# Altium PCB MB_v1.PcbDoc (part 5 of 10)
Units mm, origin at the board's own origin, x right, y up, seen from the top; angles counter-clockwise.
Board outline 203 x 72 mm, 6 copper layers (Top Layer, Layer 3, Layer 1, Layer 2, Layer 4, Bottom Layer), stack 1.52 mm thick; 655 components, 569 nets, 2943 pads, 1834 vias.
Unrouted connection lines stored in the file: 31.
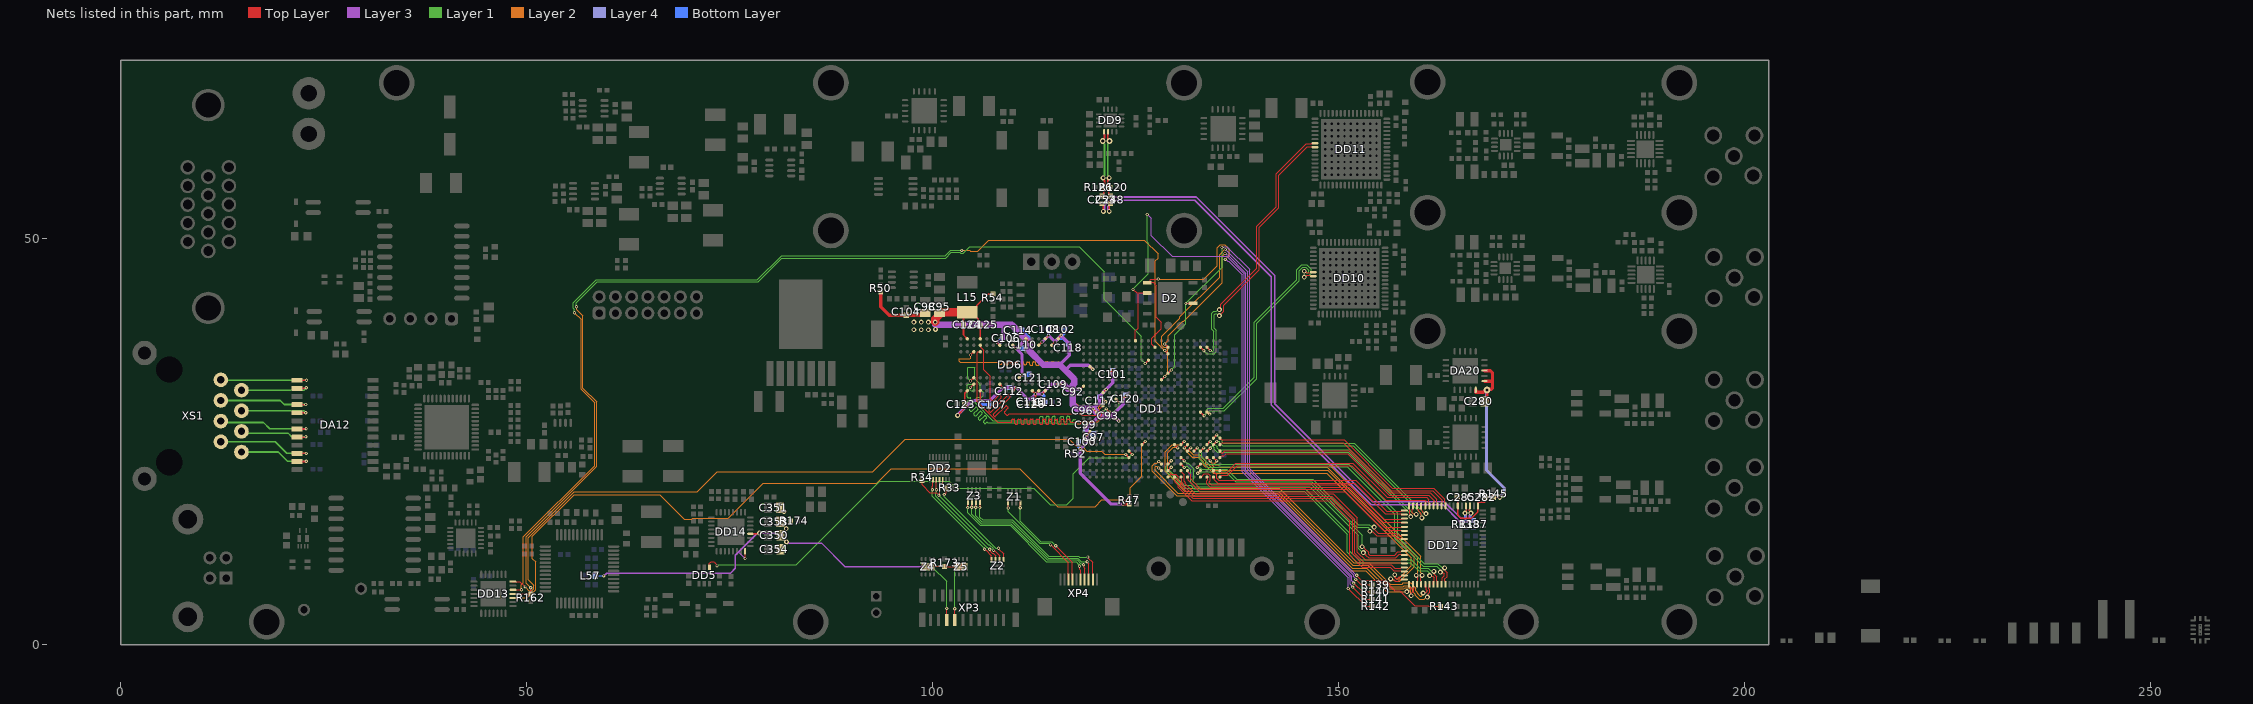
[diagram p8: the nets of this part, all layers, seen from the top]

## Via types
v1: diameter 0.4, hole 0.2, Top Layer to Bottom Layer, tented both sides, 654 vias
v2: diameter 0.8, hole 0.4, Top Layer to Bottom Layer, tented both sides, 489 vias
v3: diameter 0.6, hole 0.3, Top Layer to Bottom Layer, tented both sides, 354 vias
v4: diameter 0.7, hole 0.4, Top Layer to Bottom Layer, tented both sides, 144 vias
v5: diameter 0.8, hole 0.4, Top Layer to Bottom Layer, 87 vias
v6: diameter 0.9, hole 0.5, Top Layer to Bottom Layer, 45 vias
v7: diameter 0.66, hole 0.4, Top Layer to Bottom Layer, 25 vias
v8: diameter 0.7, hole 0.3, Top Layer to Bottom Layer, 13 vias
v9: diameter 0.5, hole 0.2, Top Layer to Bottom Layer, 12 vias
v10: diameter 0.5, hole 0.3, Top Layer to Bottom Layer, 5 vias
v11: diameter 1, hole 0.5, Top Layer to Bottom Layer, 2 vias
v12: diameter 0.4, hole 0.2, Top Layer to Bottom Layer, 2 vias
v13: diameter 0.9, hole 0.4, Top Layer to Bottom Layer, tented both sides, 2 vias

## Nets (pads, with @x,y where several pads share a name; then routed paths per layer and width w, separated by ;. In a path a pad name is that pad's centre, name@x,y a point inside that pad or via, vN(x,y) a via of type N, cw(c..) or ccw(c..) an arc to the next point about the centre after c; other vN are vias at no path point) (continued)
CAT_DTR: DD1.W8 DD13.28 | length 89.6
  Top Layer w0.125: DD13.28@48.325,7.75 49.175,7.75 v1(49.825,7.1)
  Top Layer w0.2: v1(123.811,23.426) DD1.W8@124.212,23.025
  Layer 2 w0.125: v1(49.825,7.1) 50.288,6.638 50.675,6.638 50.888,6.85 50.888,7.313 50.237,7.963 50.237,13.181 55.882,18.825 71.02,18.825 73.47,21.275 92.625,21.275 96.65,25.3 116.829,25.3 117.648,24.481 118.368,24.481 119.024,23.825 120.85,23.825 121.249,23.426 v1(123.811,23.426)
CAT_RTS: DD1.U10 DD13.24 | length 100.1
  Top Layer w0.125: DD13.24@48.325,5.75 48.338,5.763 v1(49.388,5.763)
  Top Layer w0.2: DD1.U10@125.812,24.625 125.813,24.625 v1(126.213,25.024) v1(126.213,25.024)
  Layer 2 w0.125: v1(49.388,5.763) 50.118,5.763 51.113,6.757 51.113,10.186 50.702,10.597 50.702,13.327 55.85,18.475 66.412,18.475 69.45,15.437 70.331,15.437 70.468,15.575 74.875,15.575 79.163,19.863 92.488,19.863 92.5,19.875 93.15,19.875 94.925,21.65 110.764,21.65 115.411,17.002 120.052,17.002 120.861,17.811 123.851,17.811 124.346,18.306 124.346,19.292 125.812,20.758 125.812,24.625 126.211,25.024 v1(126.213,25.024)
CAT_RXD: DD1.D11 DD13.25 R162.1 | length 126.1
  Top Layer w0.125: DD13.25@48.325,6.25 50.5,6.25 R162.1@50.525,6.225 v1(50.525,7)
  Top Layer w0.2: v1(126.211,34.624) DD1.D11@126.612,35.025
  Layer 1 w0.125: v1(56.15,41.625) 56.15,42.125 58.713,44.688 78.54,44.688 81.452,47.6 101.618,47.6 102.343,48.325 103.337,48.325 103.475,48.187 103.775,48.187 104.575,48.988 118.056,48.988 121.15,45.893 121.15,42.555 125.75,37.955 125.75,35.084 v1(126.211,34.624)
  Layer 2 w0.125: v1(50.525,7) 49.97,7.555 49.97,13.295 58.625,21.95 58.625,29.893 56.95,31.568 56.95,40.488 56.2,41.237 56.2,41.575 v1(56.15,41.625)
CAT_TXD: DD1.C14 DD13.26 | length 130.3
  Top Layer w0.125: DD13.26@48.325,6.75 v1(49.375,6.75)
  Top Layer w0.2: v1(128.611,36.226) DD1.C14@129.012,35.825
  Layer 1 w0.125: v1(55.91,40.871) 55.91,41.299 55.787,41.422 55.787,42.081 58.619,44.913 78.447,44.913 81.409,47.875 101.575,47.875 102.25,48.55 v1(103.625,48.55)
  Layer 2 w0.125: v1(49.375,6.75) 49.375,7.375 49.625,7.625 49.625,13.268 58.4,22.043 58.4,29.8 56.725,31.475 56.725,40.056 v1(55.91,40.871) ; v1(103.625,48.55) 104.578,48.55 104.678,48.45 105.557,48.45 106.907,49.8 126.116,49.8 127.804,48.112 127.804,47.611 127.45,47.257 127.45,37.356 128.58,36.226 v1(128.611,36.226)
CHP: C350.2 C351.2 C353.2 C354.2 DD14.24 DD14.28 L57.2 R173.1 R174.2 XP3.5 XP3.7 Z4.9 Z5.9 | length 66.7
  Top Layer w0.125: v1(76.925,10.6) DD14.24@76.925,11.5 ; v9(99.933,9.6) 99.958,9.625 R173.1@101.5,9.625 101.525,9.6 v9(103.017,9.6) ; XP3.5@101.661,3.034 XP3.5@101.761,3.034 101.761,4.439 v1(101.75,4.45) ; v1(102.75,4.4) 102.761,4.389 XP3.7@102.761,3.034
  Top Layer w0.2: DD14.28@77.575,13.65 78.638,13.65 v3(78.713,13.725)
  Layer 3 w0.125: 76.138,11.438 76.138,11.387 v1(76.925,10.6)
  Layer 3 w0.2: v1(59.506,8.456) 59.525,8.456 59.869,8.8 75.125,8.8 75.718,9.393 75.718,11.018 76.138,11.438 78.357,13.657 78.646,13.657 v3(78.713,13.725) ; v3@78.713,13.734 80.941,13.734 v3(82.025,12.65) 82.133,12.65 82.283,12.5 86.325,12.5 89.225,9.6 v9(98.917,9.6)
  Layer 1 w0.125: v9(99.933,9.6) 101.75,7.783 v1(101.75,4.45) ; v1(102.75,4.4) 102.75,9.333 v9(103.017,9.6) v9(104.033,9.6)
  Bottom Layer w0.125: L57.2@58.48,8.475 59.475,8.475 v1@59.5,8.45
  other v3: 82,14.275 81.734,16.391
CLKOUT0_N: DD1.M20 DD10.39 | length 27.5
  Top Layer w0.125: v3(145.8,45.986) 145.911,45.986 146.111,45.786 146.502,45.786 146.59,45.873 DD10.39@146.917,45.873
  Top Layer w0.2: DD1.M20@133.812,28.625 133.866,28.625 134.104,28.387 v1(134.154,28.387)
  Layer 1 w0.125: v1(134.154,28.387) 134.154,28.462 134.061,28.554 134.061,28.701 134.134,28.775 135.959,28.775 139.95,32.765 139.95,39.575 145.188,44.813 145.188,46.063 145.598,46.473 146.002,46.473 146.363,46.112 146.363,45.859 146.289,45.786 146.111,45.786 145.911,45.986 v3(145.8,45.986)
CLKOUT0_P: DD1.M19 DD10.40 | length 29.6
  Top Layer w0.125: v3(145.8,45.261) 145.911,45.261 146.111,45.461 146.502,45.461 146.59,45.373 DD10.40@146.917,45.373
  Top Layer w0.2: DD1.M19@133.012,28.625 v1(133.46,28.18)
  Layer 1 w0.125: v1(133.46,28.18) 133.736,28.456 133.736,28.836 133.999,29.1 135.825,29.1 139.625,32.9 139.625,39.71 144.863,44.947 144.863,46.197 145.463,46.798 146.137,46.798 146.688,46.247 146.688,45.724 146.424,45.461 146.111,45.461 145.911,45.261 v3(145.8,45.261)
CLKOUT1_N: DD1.B20 DD11.39 | length 32.8
  Top Layer w0.125: v3(135.35,41.25) 135.35,41.373 135.537,41.561 135.537,41.915 139.95,46.327 139.95,47.851 139.95,51.541 142.333,53.923 142.333,57.967 146.04,61.674 146.71,61.674 146.797,61.762 DD11.39@147.124,61.762
  Top Layer w0.2: DD1.B20@133.812,36.625 v1(134.213,36.224)
  Layer 1 w0.125: v1(134.213,36.224) 134.288,36.224 134.354,36.157 134.578,36.157 134.651,36.23 134.651,38.589 134.414,38.826 134.414,40.786 134.678,41.05 134.989,41.05 135.05,41.111 135.082,41.111 135.221,41.25 v3(135.35,41.25)
CLKOUT1_P: DD1.B19 DD11.40 | length 34.1
  Top Layer w0.125: v3(135.35,40.525) 135.862,41.037 135.862,41.78 140.275,46.192 140.275,47.716 140.275,51.406 142.658,53.789 142.658,57.833 146.175,61.349 146.71,61.349 146.797,61.262 DD11.40@147.124,61.262
  Top Layer w0.2: DD1.B19@133.012,36.625 v1(133.442,36.195)
  Layer 1 w0.125: v1(133.442,36.195) 133.805,35.832 134.712,35.832 134.976,36.096 134.976,38.724 134.739,38.961 134.739,40.652 134.813,40.725 135.039,40.725 135.239,40.525 v3(135.35,40.525)
CON_RS422A: XP4.9 Z3.4 | length 20.2
  Top Layer w0.125: v1(105.85,16.875) 105.875,16.9 Z3.4@105.875,17.535 ; v1(119.151,10.784) 119.151,10.724 119.75,10.125 XP4.9@119.75,8
  Layer 1 w0.125: v1(105.85,16.875) 105.85,16.5 105.85,16.288 105.85,15.688 106.188,15.35 109.859,15.35 114.334,10.875 118.005,10.875 118.096,10.784 v1(119.151,10.784)
CON_RS422B: XP4.8 Z3.3 | length 20
  Top Layer w0.125: v1(105.351,16.901) 105.363,16.913 105.363,17.523 Z3.3@105.375,17.535 ; v1(119.05,10.2) 119.05,10.126 119.25,9.926 XP4.8@119.25,8
  Layer 1 w0.125: v1(105.351,16.901) 105.351,15.869 106.095,15.125 109.766,15.125 114.241,10.65 117.911,10.65 118.361,10.2 v1(119.05,10.2)
CON_RS422Y: XP4.6 Z3.1 | length 19.6
  Top Layer w0.125: v1(104.351,16.874) 104.375,16.898 Z3.1@104.375,17.535 ; v1(118.117,9.645) 118.17,9.593 118.17,9.276 118.25,9.195 XP4.6@118.25,8
  Layer 1 w0.125: v1(104.351,16.874) 104.351,16.233 105.908,14.675 109.575,14.675 114.05,10.2 117.725,10.2 117.88,10.045 117.88,9.956 118.117,9.719 v1(118.117,9.645)
CON_RS422Z: XP4.7 Z3.2 | length 19.7
  Top Layer w0.125: v1(104.85,16.9) 104.862,16.912 104.862,17.522 Z3.2@104.875,17.535 ; v1(118.621,9.837) 118.674,9.785 118.674,9.463 118.75,9.387 XP4.7@118.75,8
  Layer 1 w0.125: v1(104.85,16.9) 104.85,16.051 106.001,14.9 109.672,14.9 114.147,10.425 117.818,10.425 118.268,9.975 118.41,9.975 118.547,9.837 v1(118.621,9.837)
CON_TX_FAIL: XP4.3 Z1.1 | length 13.2
  Top Layer w0.125: v1(109.325,16.825) Z1.1@109.325,17.445 ; v1(114.55,12.275) 116.75,10.075 XP4.3@116.75,8
  Layer 1 w0.125: v1(109.325,16.825) 109.35,16.8 109.35,16.35 113.25,12.45 114.339,12.45 114.514,12.275 v1(114.55,12.275)
CON_TXON: XP4.4 Z1.4 | length 12.9
  Top Layer w0.125: v1(110.825,16.85) Z1.4@110.825,17.445 ; v1(115.2,12.175) 117.25,10.125 XP4.4@117.25,8
  Layer 1 w0.125: v1(110.825,16.85) 110.825,15.193 113.343,12.675 114.7,12.675 v1(115.2,12.175)
CW_KEY: DD1.V8 DD5.4 | length 63.4
  Top Layer w0.125: DD5.4@72.532,9.534 72.532,10.032 72.725,10.225 73.125,10.225 73.239,10.111 73.239,9.985 73.457,9.767 v1(73.457,9.693)
  Top Layer w0.2: DD1.V8@124.212,23.825 v1(124.613,23.424)
  Layer 1 w0.125: v1(73.457,9.693) 73.532,9.693 73.664,9.825 83.252,9.825 93.54,20.113 102.076,20.113 102.963,19.225 112.501,19.225 114.499,17.227 116.559,17.227 117.375,18.043 117.375,21.035 119.34,23 124.19,23 v1(124.613,23.424)
D_RS422A: DD2.12 R33.1 Z2.5 | length 13.4
  Top Layer w0.125: DD2.12@101.275,20.305 101.275,19.707 R33.1@101.695,19.287 101.695,18.72 v1(101.45,18.475) ; v1(108.132,11.859) 108.132,11.818 108.775,11.175 Z2.5@108.775,10.455
  Layer 1 w0.125: v1(101.45,18.475) 101.454,18.471 101.454,18.181 107.776,11.859 v1(108.132,11.859)
D_RS422B: DD2.11 R34.2 Z2.6 | length 16.2
  Top Layer w0.125: R34.2@98.716,20.176 98.716,19.674 99.669,18.721 100.479,18.721 v1@100.763,18.437 ; v1(100.8,18.4) 100.8,18.474 100.875,18.549 DD2.11@100.875,20.305 ; v1(107.528,11.595) 107.58,11.542 107.69,11.542 108.275,10.958 Z2.6@108.275,10.455
  Layer 1 w0.125: v1(100.8,18.4) 106.896,12.304 107.013,12.304 107.475,11.842 107.475,11.647 v1(107.528,11.595)
D_RS422Y: DD2.9 Z2.8 | length 12.9
  Top Layer w0.125: v1(99.997,19.083) 99.999,19.086 99.999,19.471 100.062,19.533 100.062,20.292 DD2.9@100.075,20.305 ; v1(106.426,11.726) 106.479,11.674 106.559,11.674 107.275,10.958 Z2.8@107.275,10.455
  Layer 1 w0.125: v1(99.997,19.083) 99.997,18.28 106.339,11.937 106.339,11.888 106.426,11.801 v1(106.426,11.726)
D_RS422Z: DD2.10 Z2.7 | length 13.1
  Top Layer w0.125: DD2.10@100.475,20.305 100.486,20.294 100.486,19.093 v1(100.497,19.083) ; v1(107.05,11.754) 107.103,11.701 107.103,11.507 107.377,11.232 107.5,11.232 107.775,10.958 Z2.7@107.775,10.455
  Layer 1 w0.125: v1(100.497,19.083) 100.453,19.039 100.453,18.695 100.391,18.633 100.391,18.275 106.663,12.003 106.751,12.003 107,11.754 v1(107.05,11.754)
DA_N: DA12.14 XS1.2 | length 9.3
  Top Layer w0.2: DA12.14@21.741,31.551 22.747,31.551 22.821,31.625 v1(22.875,31.625)
  Layer 1 w0.2: XS1.2@14.891,31.337 22.587,31.337 v1(22.875,31.625)
DA_P: DA12.13 XS1.1 | length 11.7
  Top Layer w0.2: DA12.13@21.741,32.551 22.899,32.551 v1(22.9,32.55)
  Layer 1 w0.2: XS1.1@12.351,32.607 12.408,32.55 v1(22.9,32.55)
DAC_CLK_N: C253.1 DD12.4 R138.2 | length 75.1
  Top Layer w0.125: v3(165.597,16.2) 165.597,16.271 165.798,16.472 165.798,16.663 165.71,16.75 DD12.4@165.71,17.084
  Top Layer w0.2: C253.1@120.9,54.34 121.05,54.19 v3(121.05,53.365)
  Layer 3 w0.2: v3(121.05,53.365) 121.05,53.473 121.212,53.636 121.212,54.081 122.257,55.125 132.491,55.125 142.15,45.466 142.15,29.666 154.207,17.609 163.057,17.609 165.133,15.533 165.643,15.533 165.76,15.65 165.76,15.929 165.597,16.092 v3(165.597,16.2)
  Bottom Layer w0.2: v3(165.597,16.2) 165.597,15.428 R138.2@165.725,15.3
DAC_CLK_P: C248.1 DD12.3 R137.2 | length 75.2
  Top Layer w0.125: DD12.3@166.21,17.084 166.21,16.75 166.123,16.663 166.123,16.471 166.322,16.272 v3(166.322,16.2)
  Top Layer w0.2: v3(121.775,53.365) 121.775,54.19 C248.1@121.925,54.34
  Layer 3 w0.2: v3(121.775,53.365) 121.775,53.473 121.612,53.636 121.612,53.915 122.422,54.725 132.325,54.725 141.75,45.3 141.75,29.5 154.041,17.209 162.891,17.209 164.968,15.133 165.809,15.133 166.16,15.484 166.16,15.929 166.322,16.092 v3(166.322,16.2)
  Bottom Layer w0.2: v3(166.322,16.2) 166.322,15.628 R137.2@166.65,15.3
DAC_CSB: DD1.B14 R140.1 | length 64.8
  Top Layer w0.125: v1(151.9,7.575) 152.998,6.477 R140.1@154.127,6.477
  Top Layer w0.2: v1(128.611,37.026) DD1.B14@129.012,36.625
  Layer 3 w0.125: v1(136.038,48.169) 136.112,48.169 136.249,48.031 136.351,48.031 138.616,45.766 138.616,21.495 151.675,8.436 151.675,7.874 151.9,7.649 v1(151.9,7.575)
  Layer 2 w0.125: v1(128.611,37.026) 129.048,37.464 129.048,38.048 130.837,39.837 130.975,39.837 135.689,44.551 135.689,47.82 v1(136.038,48.169)
DAC_CVDD: C280.2 C282.2 C285.2 DA20.1 DA20.3 DA20.20 DD12.1 DD12.6 R145.2 | length 32
  Top Layer w0.2: C285.2@164.658,18.161 164.71,18.109 DD12.6@164.71,17.084 164.71,15.956 165.133,15.533 166.362,15.533 167.16,16.33 167.16,16.644 167.2,16.684 167.2,17.074 DD12.1@167.21,17.084 167.22,17.094 167.22,17.408 167.337,17.525 168.001,17.525 168.118,17.642 C282.2@168.118,18.161 169.089,18.161 R145.2@169.125,18.125 169.15,18.15 v3@169.85,18.15
  Top Layer w0.4: DA20.20@166.926,31.364 166.926,31.074 167.889,31.074 168.165,31.35 v13(168.3,31.35) ; DA20.1@168.001,32.439 168.975,32.439 ; DA20.3@168.001,33.739 168.741,33.739 168.975,33.505 168.975,32.439 ; C280.2@168.125,29.95 168.3,30.125 v13(168.3,31.35) ; v13(168.3,31.35) 168.396,31.446 168.836,31.446 168.975,31.584 168.975,32.439
  Layer 4 w0.4: v13(168.3,31.35) 168.25,31.3 168.25,21.467 170.464,19.253 170.464,18.735 169.889,18.159 v3(169.889,18.111)
DAC_D0_N: DD1.V19 DD12.46 | length 41.4
  Top Layer w0.125: v3(163.088,9.438) 163.166,9.359 163.166,9.077 163.386,8.856 163.386,8.352 163.123,8.088 163.123,7.855 163.21,7.768 DD12.46@163.21,7.434
  Top Layer w0.2: DD1.V19@133.012,23.825 133.012,23.826 133.411,24.225 v1(133.411,24.226)
  Layer 1 w0.125: v1(133.411,24.226) 133.175,23.99 133.175,23.044 134.032,22.186 135.195,22.186 135.209,22.2 151.26,22.2 157.3,16.16 157.3,13.26 160.585,9.975 162.267,9.975 162.727,9.516 163.009,9.516 v3(163.088,9.438)
DAC_D0_P: DD1.V18 DD12.45 | length 41.4
  Top Layer w0.125: v3(162.575,8.925) 162.653,8.847 162.936,8.847 163.061,8.722 163.061,8.487 162.798,8.223 162.798,7.855 162.71,7.768 DD12.45@162.71,7.434
  Top Layer w0.2: DD1.V18@132.212,23.825 v1(132.613,24.226)
  Layer 1 w0.125: v1(132.613,24.226) 132.85,23.99 132.85,22.909 133.898,21.861 135.329,21.861 135.343,21.875 151.125,21.875 156.975,16.025 156.975,13.125 160.45,9.65 162.133,9.65 162.497,9.286 162.497,9.003 v3(162.575,8.925)
DAC_D1_N: DD1.AA14 DD12.44 | length 41.9
  Top Layer w0.125: v3(161.763,9.013) 161.841,8.934 161.841,8.652 162.123,8.37 162.123,7.855 162.21,7.768 DD12.44@162.21,7.434
  Top Layer w0.2: DD1.AA14@129.012,21.425 v1(129.413,21.826)
  Layer 1 w0.125: v1(129.413,21.826) 129.396,21.826 129.147,21.577 129.147,21.474 131.021,19.6 131.793,19.6 132.182,19.211 145.924,19.211 151.425,13.71 151.425,11.485 152.485,10.425 159.01,10.425 160.01,9.425 161.067,9.425 161.402,9.091 161.684,9.091 v3(161.763,9.013)
DAC_D1_P: DD1.Y14 DD12.43 | length 42.8
  Top Layer w0.125: v3(161.25,8.5) 161.328,8.422 161.611,8.422 161.797,8.235 161.797,7.855 161.71,7.768 DD12.43@161.71,7.434
  Top Layer w0.2: DD1.Y14@129.012,22.225 v1(129.413,22.626)
  Layer 1 w0.125: v1(129.413,22.626) 128.822,22.035 128.822,21.339 130.887,19.275 131.658,19.275 132.047,18.886 145.789,18.886 151.1,13.575 151.1,11.351 152.351,10.1 158.875,10.1 159.875,9.1 160.933,9.1 161.172,8.861 161.172,8.578 v3(161.25,8.5)
DAC_D2_N: DD1.U16 DD12.42 | length 47
  Top Layer w0.125: v3(160.963,5.837) 161.041,5.916 161.041,6.198 161.261,6.419 161.261,6.791 161.158,6.895 161.158,6.998 161.186,7.026 161.186,7.41 DD12.42@161.21,7.434
  Top Layer w0.2: DD1.U16@130.612,24.625 v1(131.013,25.026)
  Layer 2 w0.125: v1(131.013,25.026) 130.612,24.625 130.137,24.625 129.534,24.625 128.651,23.742 128.651,21.326 131.077,18.9 142.603,18.9 151.753,9.75 153.626,9.75 156.276,7.1 157.982,7.1 158.145,7.263 158.755,7.263 159.188,6.83 159.188,6.477 159.45,6.214 159.45,6.097 159.948,5.6 160.597,5.6 160.834,5.837 v3(160.963,5.837)
DAC_D2_P: DD1.U15 DD12.41 | length 44.4
  Top Layer w0.125: v3(160.45,6.35) 160.528,6.428 160.811,6.428 160.936,6.553 160.936,6.657 160.833,6.76 160.833,6.977 160.71,7.1 DD12.41@160.71,7.434
  Top Layer w0.2: DD1.U15@129.812,24.625 v1(130.213,24.224)
  Layer 2 w0.125: v1(130.213,24.224) 130.161,24.276 130.027,24.276 130.003,24.3 129.668,24.3 128.976,23.608 128.976,21.461 131.212,19.225 142.737,19.225 151.887,10.075 153.76,10.075 156.41,7.425 157.847,7.425 158.01,7.588 158.89,7.588 159.513,6.965 159.513,6.612 159.775,6.349 159.775,6.232 160.082,5.925 160.186,5.925 160.359,6.098 160.359,6.259 v3(160.45,6.35)
DAC_D3_N: DD1.W21 DD12.40 | length 34.7
  Top Layer w0.125: DD12.40@160.21,7.434 160.21,7.768 160.123,7.855 160.123,8.214 160.323,8.414 v3(160.323,8.525)
  Top Layer w0.2: DD1.W21@134.612,23.025 v1(135.013,22.624)
  Layer 2 w0.125: v1(135.013,22.624) 135.013,22.6 134.776,22.363 134.776,22.242 134.849,22.169 135.355,22.169 135.371,22.186 136.762,22.186 148.791,22.186 160.123,10.855 160.123,8.836 160.323,8.636 v3(160.323,8.525)
DAC_D3_P: DD1.W20 DD12.39 | length 34.7
  Top Layer w0.125: v3(159.598,8.525) 159.598,8.414 159.798,8.214 159.798,7.855 159.71,7.768 DD12.39@159.71,7.434
  Top Layer w0.2: DD1.W20@133.812,23.025 v1(134.213,22.624)
  Layer 2 w0.125: v1(134.213,22.624) 134.213,22.6 134.451,22.363 134.451,22.108 134.715,21.844 135.489,21.844 135.506,21.861 136.762,21.861 148.656,21.861 159.798,10.72 159.798,8.836 159.598,8.636 v3(159.598,8.525)
DAC_D4_N: DD1.AA13 DD12.38 | length 41.5
  Top Layer w0.125: v3(158.963,6.012) 159.041,6.091 159.041,6.373 159.261,6.594 159.261,6.966 159.234,6.994 159.234,7.41 DD12.38@159.21,7.434
  Top Layer w0.2: v1(127.885,21.752) DD1.AA13@128.212,21.425
  Layer 2 w0.125: v1(127.885,21.752) 127.862,21.752 127.624,21.99 127.504,21.99 127.43,21.916 127.43,21.457 130.237,18.65 142.497,18.65 151.722,9.425 153.51,9.425 156.085,6.85 158.086,6.85 158.248,7.013 158.652,7.013 158.938,6.727 158.938,6.037 v3(158.963,6.012)
DAC_D4_P: DD1.Y13 DD12.37 | length 41
  Top Layer w0.125: v3(158.45,6.525) 158.528,6.603 158.811,6.603 158.936,6.728 158.936,6.832 158.909,6.859 158.909,6.901 158.71,7.1 DD12.37@158.71,7.434
  Top Layer w0.2: v1(127.885,22.552) DD1.Y13@128.212,22.225
  Layer 2 w0.125: v1(127.885,22.552) 127.862,22.552 127.624,22.315 127.369,22.315 127.105,22.051 127.105,21.322 130.103,18.325 142.362,18.325 151.587,9.1 153.375,9.1 155.95,6.525 v3(158.45,6.525)
DAC_D5_N: DD1.V17 DD12.36 | length 41.3
  Top Layer w0.125: v3(156.437,8.087) 156.516,8.009 156.798,8.009 157.019,7.789 157.391,7.789 157.627,8.025 158.119,8.025 DD12.36@158.135,8.009
  Top Layer w0.2: DD1.V17@131.412,23.825 v1(131.813,24.226)
  Layer 2 w0.125: v1(131.813,24.226) 131.775,24.226 131.584,24.035 131.584,23.932 132.129,23.386 132.926,23.386 133.684,22.628 133.684,22.298 133.757,22.225 133.947,22.225 134.722,21.45 148.714,21.45 159.325,10.839 159.325,9.565 157.548,7.789 157.019,7.789 156.798,8.009 156.516,8.009 v3(156.437,8.087)
DAC_D5_P: DD1.U17 DD12.35 | length 40.3
  Top Layer w0.125: v3(156.95,8.6) 157.028,8.522 157.028,8.239 157.153,8.114 157.257,8.114 157.493,8.35 157.642,8.35 157.801,8.509 DD12.35@158.135,8.509
  Top Layer w0.2: v1(131.011,24.224) DD1.U17@131.412,24.625
  Layer 2 w0.125: v1(131.011,24.224) 131.052,24.224 131.259,24.016 131.259,23.797 131.995,23.061 132.792,23.061 133.359,22.493 133.359,22.164 133.623,21.9 133.812,21.9 134.587,21.125 148.579,21.125 159,10.704 159,9.7 157.414,8.114 157.153,8.114 157.028,8.239 157.028,8.522 v3(156.95,8.6)
DAC_D6_N: DD1.AB15 DD12.34 | length 36
  Top Layer w0.125: DD1.AB15@129.812,20.625 129.812,20.551 129.924,20.438 129.924,19.988 130.263,19.65 130.263,19.397 131.959,17.7 148.95,17.7 151.425,15.225 151.425,11.026 152.929,9.521 156.394,9.521 156.819,9.096 157.714,9.096 157.801,9.009 DD12.34@158.135,9.009
DAC_D6_P: DD1.AB14 DD12.33 | length 37
  Top Layer w0.125: DD1.AB14@129.012,20.625 129.061,20.625 129.423,20.988 129.962,20.988 130.249,20.7 130.249,20.123 130.588,19.785 130.588,19.532 132.094,18.025 149.085,18.025 151.75,15.36 151.75,11.16 153.064,9.846 156.529,9.846 156.954,9.422 157.714,9.422 157.801,9.509 DD12.33@158.135,9.509
DAC_D7_N: DD1.AB16 DD12.32 | length 34.8
  Top Layer w0.125: DD1.AB16@130.612,20.625 130.612,20.551 130.699,20.463 130.699,19.991 130.813,19.878 130.813,19.66 132.223,18.25 149.213,18.25 152,15.463 152,11.264 153.167,10.096 157.714,10.096 157.801,10.009 DD12.32@158.135,10.009
DAC_D7_P: DD1.AA16 DD12.31 | length 35.2
  Top Layer w0.125: DD1.AA16@130.612,21.425 130.612,21.351 131.024,20.939 131.024,20.126 131.138,20.013 131.138,19.795 132.357,18.575 149.348,18.575 152.325,15.598 152.325,11.398 153.302,10.422 157.714,10.422 157.801,10.509 DD12.31@158.135,10.509
DAC_D8_N: DD1.AB17 DD12.24 | length 29.6
  Top Layer w0.125: DD1.AB17@131.412,20.625 131.412,20.551 131.499,20.463 131.499,20.259 131.825,19.934 131.825,19.922 132.946,18.8 150.815,18.8 155.519,14.096 157.714,14.096 157.801,14.009 DD12.24@158.135,14.009
DAC_D8_P: DD1.AA17 DD12.23 | length 30
  Top Layer w0.125: DD1.AA17@131.412,21.425 131.412,21.351 131.824,20.939 131.824,20.394 132.15,20.069 132.15,20.056 132.406,19.8 132.418,19.8 132.507,19.711 132.507,19.699 133.081,19.125 150.95,19.125 155.654,14.422 157.714,14.422 157.801,14.509 DD12.23@158.135,14.509
DAC_D9_N: DD1.AB20 DD12.22 | length 27.3
  Top Layer w0.125: DD1.AB20@133.812,20.625 133.865,20.572 133.865,20.438 133.889,20.414 133.889,20.311 133.777,20.199 133.777,19.789 134.215,19.35 151.29,19.35 155.544,15.097 157.714,15.097 157.801,15.009 DD12.22@158.135,15.009
DAC_D9_P: DD1.AB19 DD12.21 | length 28.3
  Top Layer w0.125: DD1.AB19@133.012,20.625 133.086,20.625 133.473,21.013 133.973,21.013 134.214,20.771 134.214,20.176 134.102,20.064 134.102,19.923 134.35,19.675 151.425,19.675 155.679,15.422 157.714,15.422 157.801,15.509 DD12.21@158.135,15.509
DAC_D10_N: DD1.AB21 DD12.20 | length 25.6
  Top Layer w0.125: DD1.AB21@134.612,20.625 134.612,20.551 134.699,20.463 134.699,20.33 135.129,19.9 152,19.9 155.804,16.097 157.714,16.097 157.801,16.009 DD12.20@158.135,16.009
DAC_D10_P: DD1.AA21 DD12.19 | length 26
  Top Layer w0.125: DD1.AA21@134.612,21.425 134.612,21.351 135.024,20.939 135.024,20.464 135.264,20.225 152.135,20.225 155.938,16.422 157.714,16.422 157.801,16.509 DD12.19@158.135,16.509
DAC_D11_N: DD1.V20 DD12.18 | length 30.7
  Top Layer w0.125: DD12.18@158.71,17.084 158.71,16.75 158.798,16.663 158.798,16.119 158.834,16.083 158.834,15.85 v3(158.925,15.759)
  Top Layer w0.2: DD1.V20@133.812,23.825 133.843,23.825 134.194,24.175 v1(134.225,24.175)
  Layer 1 w0.125: v1(134.225,24.175) 134.225,24.249 134.333,24.357 134.333,24.365 134.406,24.438 134.51,24.438 134.732,24.216 134.732,24.048 135.105,23.675 151.242,23.675 158.834,16.083 158.834,15.85 v3(158.925,15.759)
DAC_D11_P: DD1.U20 DD12.17 | length 31.2
  Top Layer w0.125: DD12.17@159.21,17.084 159.21,16.75 159.123,16.663 159.123,16.254 159.247,16.129 159.503,16.129 v3(159.594,16.038)
  Top Layer w0.2: DD1.U20@133.812,24.625 v1(134.213,25.026)
  Layer 1 w0.125: v1(134.213,25.026) 134.213,24.956 134.406,24.763 134.644,24.763 135.057,24.351 135.057,24.183 135.24,24 151.377,24 159.247,16.129 159.503,16.129 v3(159.594,16.038)
DAC_D12_N: DD1.U21 DD12.16 | length 31.8
  Top Layer w0.125: DD12.16@159.71,17.084 159.71,16.75 159.875,16.586 159.875,16.447 160.081,16.24 160.081,16.183 160.209,16.055 160.209,15.691 v3(160.287,15.612)
  Top Layer w0.2: DD1.U21@134.612,24.625 v1(135.013,25.026)
  Layer 1 w0.125: v1(135.013,25.026) 135.018,25.031 135.316,25.031 135.401,24.946 135.401,24.806 135.732,24.475 151.847,24.475 160.081,16.24 160.081,16.154 160.196,16.039 160.196,15.703 v3(160.287,15.612)
DAC_D12_P: DD1.T21 DD12.15 | length 31.8
  Top Layer w0.125: DD12.15@160.21,17.084 160.2,17.074 160.2,16.582 160.406,16.375 160.406,16.317 160.508,16.216 160.709,16.216 v3(160.8,16.125)
  Top Layer w0.2: DD1.T21@134.612,25.425 v1(135.013,25.826)
  Layer 1 w0.125: v1(135.013,25.826) 135.013,25.793 135.726,25.08 135.726,24.94 135.866,24.8 151.981,24.8 160.406,16.375 160.406,16.317 160.508,16.216 160.709,16.216 v3(160.8,16.125)
DAC_D13_N: DD1.AB22 DD12.14 | length 28.4
  Top Layer w0.125: DD1.AB22@135.412,20.625 135.412,20.656 135.619,20.862 136.387,20.862 137.52,21.995 151.67,21.995 155.865,17.8 160.724,17.8 160.798,17.727 160.798,17.505 160.71,17.418 DD12.14@160.71,17.084
DAC_D13_P: DD1.AA22 DD12.13 | length 29
  Top Layer w0.125: DD1.AA22@135.412,21.425 135.412,21.394 135.619,21.187 136.253,21.187 137.386,22.32 151.805,22.32 156,18.125 160.859,18.125 161.123,17.861 161.123,17.505 161.21,17.418 DD12.13@161.21,17.084
DAC_D14_N: DD1.W22 DD12.12 | length 29.7
  Top Layer w0.125: DD1.W22@135.412,23.025 135.65,23.263 135.905,23.263 136.162,23.52 151.132,23.52 156.277,18.375 161.161,18.375 161.798,17.738 161.798,17.505 161.71,17.418 DD12.12@161.71,17.084
DAC_D14_P: DD1.V22 DD12.11 | length 30.2
  Top Layer w0.125: DD1.V22@135.412,23.825 135.649,23.588 135.77,23.588 136.028,23.845 151.267,23.845 156.412,18.7 161.296,18.7 162.123,17.873 162.123,17.505 162.21,17.418 DD12.11@162.21,17.084
DAC_D15_N: DD1.U22 DD12.10 | length 31.2
  Top Layer w0.125: DD1.U22@135.412,24.625 135.412,24.656 135.636,24.879 139.436,24.879 150.586,24.879 156.515,18.95 161.615,18.95 162.798,17.768 162.798,17.505 162.71,17.418 DD12.10@162.71,17.084
DAC_D15_P: DD1.T22 DD12.9 | length 31.7
  Top Layer w0.125: DD1.T22@135.412,25.425 135.412,25.415 135.623,25.204 139.301,25.204 150.721,25.204 156.65,19.275 161.75,19.275 163.123,17.902 163.123,17.505 163.21,17.418 DD12.9@163.21,17.084
DAC_DCI_N: DD1.Y16 DD12.30 | length 34.6
  Top Layer w0.125: v3(153.078,11.335) 153.117,11.335 153.39,11.062 153.39,11.005 153.716,10.679 157.064,10.679 157.481,11.097 157.714,11.097 157.801,11.009 DD12.30@158.135,11.009
  Top Layer w0.2: DD1.Y16@130.612,22.225 v1(131.013,21.824)
  Layer 1 w0.125: v1(131.013,21.824) 131.114,21.824 131.274,21.984 131.378,21.984 131.838,21.523 131.838,20.567 131.825,20.553 131.825,19.922 132.285,19.461 146.464,19.461 152.438,13.488 152.438,11.842 152.853,11.426 152.987,11.426 v3(153.078,11.335)
DAC_DCI_P: DD1.W16 DD12.29 | length 34.6
  Top Layer w0.125: v3(152.925,12.044) 153.044,12.044 153.265,11.823 153.28,11.823 153.715,11.387 153.715,11.139 153.85,11.004 156.929,11.004 157.346,11.422 157.714,11.422 157.801,11.509 DD12.29@158.135,11.509
  Top Layer w0.2: DD1.W16@130.612,23.025 v1(131.013,22.624)
  Layer 1 w0.125: v1(131.013,22.624) 131.328,22.309 131.512,22.309 132.163,21.658 132.163,20.433 132.15,20.419 132.15,20.056 132.42,19.786 146.599,19.786 152.925,13.46 v3(152.925,12.044)
DAC_DCO_N: DD1.AA19 DD12.26 | length 29.6
  Top Layer w0.125: v3(153.887,13.962) 153.966,13.884 154.248,13.884 154.753,13.38 156.914,13.38 157.197,13.096 157.714,13.096 157.801,13.009 DD12.26@158.135,13.009
  Top Layer w0.2: v1(132.685,21.099) DD1.AA19@133.012,21.425
  Layer 1 w0.125: v1(132.685,21.099) 132.757,21.17 133.095,21.17 133.185,21.261 136.114,21.261 137.339,20.036 146.702,20.036 152.288,14.45 153.683,14.45 153.809,14.323 153.809,14.041 v3(153.887,13.962)
DAC_DCO_P: DD1.Y19 DD12.25 | length 29.8
  Top Layer w0.125: v3(154.4,14.475) 154.478,14.397 154.478,14.114 154.888,13.705 157.048,13.705 157.331,13.421 157.714,13.421 157.801,13.509 DD12.25@158.135,13.509
  Top Layer w0.2: v1(132.611,21.824) DD1.Y19@133.012,22.225
  Layer 1 w0.125: v1(132.611,21.824) 132.682,21.752 133.02,21.752 133.185,21.586 136.249,21.586 137.474,20.361 146.837,20.361 152.423,14.775 153.817,14.775 154.039,14.553 154.322,14.553 v3(154.4,14.475)
DAC_RESET: DD1.G13 R139.1 | length 69.7
  Top Layer w0.125: v1(152.15,8.025) 152.809,7.366 R139.1@154.127,7.366
  Top Layer w0.2: DD1.G13@128.212,32.625 v1(128.613,33.026)
  Layer 3 w0.125: v1(136.091,48.666) 138.841,45.916 138.841,21.589 151.9,8.53 151.9,8.323 152.15,8.073 v1(152.15,8.025)
  Layer 2 w0.125: v1(128.613,33.026) 129.012,33.425 129.012,36.338 128.743,36.607 128.517,36.607 128.225,36.899 128.225,37.975 130.463,40.213 130.463,40.35 135.364,45.252 135.364,48.008 136.022,48.666 v1(136.091,48.666)
DAC_SCLK: D2.6 DD1.A9 R141.1 | length 81.4
  Top Layer w0.125: v1(124.7,43.75) 125.143,43.307 125.4,43.307 ; DD1.A9@125.012,37.425 125.012,38.634 125.367,38.989 125.367,43.274 125.4,43.307 ; D2.6@126.468,43.307 125.4,43.307 ; v1(151.775,7.075) 153.262,5.588 R141.1@154.127,5.588
  Layer 3 w0.125: v1(126.475,52.975) 126.95,52.5 126.95,50.375 129.519,47.806 136.258,47.806 138.391,45.673 138.391,21.402 151.45,8.343 151.45,7.4 v1(151.775,7.075)
  Layer 1 w0.125: v1(124.7,43.75) 126.6,45.65 126.6,49.463 126.45,49.613 126.45,52.95 v1(126.475,52.975)
DAC_SDIO: D2.5 DD1.B12 R142.1 | length 75.5
  Top Layer w0.125: D2.5@126.468,44.577 126.489,44.598 D2.5@126.666,44.598 ; DD1.B12@127.412,36.625 127.025,37.012 127.025,37.75 128.175,38.9 128.175,39.725 127.6,40.3 127.6,44.2 127.202,44.598 D2.5@126.666,44.598 ; v1(127.813,45.025) 126.916,45.025 126.807,44.916 126.807,44.739 D2.5@126.666,44.598 ; v1(151.225,6.9) 153.426,4.699 R142.1@154.127,4.699
  Layer 3 w0.125: v1(136.083,47.444) 136.157,47.444 136.366,47.235 136.511,47.235 138.166,45.579 138.166,21.309 151.225,8.25 v1(151.225,6.9)
  Layer 2 w0.125: v1(127.813,45.025) 133.45,45.025 135.075,46.65 135.075,48.9 135.45,49.275 135.994,49.275 136.553,48.716 136.553,47.914 v1(136.083,47.444)
DAC_SDO: D2.2 DD1.F14 R143.1 | length 78.8
  Top Layer w0.125: v1(131.225,42.025) 131.237,42.037 D2.2@132.098,42.037 ; v1(152.263,8.525) 152.263,8.487 152.85,7.9 155.7,7.9 156.95,6.65 157.575,6.65 159.417,4.808 161.047,4.808 161.156,4.699 R143.1@162.567,4.699
  Top Layer w0.2: DD1.F14@129.012,33.425 v1(129.413,33.826)
  Layer 3 w0.125: v1@135.649,48.917 135.696,48.964 135.876,48.964 135.941,49.028 136.241,49.028 139.066,46.203 139.066,21.684 152.225,8.525 v1(152.263,8.525)
  Layer 1 w0.125: v1(129.413,33.826) 129.85,34.263 129.85,38.15 131.225,39.525 v1(131.225,42.025) 135.675,46.475 135.675,48.891 v1(135.655,48.911)
DACCLK_N: C253.2 DD9.9 R126.1 | length 8.5
  Top Layer w0.2: C253.2@120.9,55.26 121.12,55.48 121.12,56.13 R126.1@120.925,56.325 121.196,56.596 121.196,57.204 121.034,57.367 v3(121.034,57.475) ; v4(120.983,62.018) 120.983,62.153 121.196,62.366 121.196,62.869 121.146,62.919 DD9.9@121.146,63.158
  Layer 1 w0.2: v4(120.983,62.018) 120.983,61.883 121.196,61.67 121.196,57.746 121.034,57.583 v3(121.034,57.475)
DACCLK_P: C248.2 DD9.10 R120.1 | length 8.5
  Top Layer w0.2: DD9.10@121.646,63.158 121.646,62.919 121.596,62.869 121.596,62.366 121.809,62.153 v4(121.809,62.018) ; v3(121.759,57.475) 121.759,57.367 121.596,57.204 121.596,56.629 R120.1@121.9,56.325 121.705,56.13 121.705,55.48 C248.2@121.925,55.26
  Layer 1 w0.2: v3(121.759,57.475) 121.759,57.583 121.596,57.746 121.596,61.67 121.809,61.883 v4(121.809,62.018)
DB_N: DA12.17 XS1.4 | length 9.1
  Top Layer w0.2: DA12.17@21.741,28.551 22.799,28.551 v1(22.8,28.55)
  Layer 1 w0.2: XS1.4@14.891,28.797 22.553,28.797 v1(22.8,28.55)
DB_P: DA12.16 XS1.3 | length 11.7
  Top Layer w0.2: DA12.16@21.741,29.551 22.776,29.551 v1(22.8,29.575)
  Layer 1 w0.2: XS1.3@12.351,30.067 19.683,30.067 20.175,29.575 v1(22.8,29.575)
DC_N: DA12.20 XS1.6 | length 9.3
  Top Layer w0.2: DA12.20@21.741,25.551 22.722,25.551 22.771,25.6 v1(22.825,25.6)
  Layer 1 w0.2: XS1.6@14.891,26.257 15.098,26.05 20.625,26.05 21.075,25.6 v1(22.825,25.6)
DC_P: DA12.19 XS1.5 | length 12
  Top Layer w0.2: DA12.19@21.741,26.551 22.826,26.551 v1(22.85,26.575)
  Layer 1 w0.2: XS1.5@12.351,27.527 12.521,27.357 17.593,27.357 18.375,26.575 v1(22.85,26.575)
DD_N: DA12.23 XS1.8 | length 9.6
  Top Layer w0.2: DA12.23@21.741,22.551 22.851,22.551 v1(22.875,22.575)
  Layer 1 w0.2: XS1.8@14.891,23.717 19.408,23.717 20.55,22.575 v1(22.875,22.575)
DD_P: DA12.22 XS1.7 | length 12.3
  Top Layer w0.2: DA12.22@21.741,23.551 v1(22.875,23.55) v1(22.875,23.55)
  Layer 1 w0.2: XS1.7@12.351,24.987 19.038,24.987 20.475,23.55 v1(22.875,23.55)
DDR_1V5: C92.2 C93.2 C95.2 C96.2 C97.2 C98.2 C99.2 C100.2 C101.2 C102.2 C104.2 C106.2 C107.2 C108.2 C109.2 C110.2 C112.2 C113.2 C114.2 C116.2 C117.2 C118.2 C120.2 C121.2 C123.2 C124.2 C125.2 C126.2 DD1.E2 DD1.F5 DD1.H1 DD1.J4 DD1.K7 DD1.M3 DD1.N6 DD1.R2 DD1.V1 DD6.A1 DD6.A8 DD6.B2 DD6.C1 DD6.C9 DD6.D2 DD6.D9 DD6.E9 DD6.F1 DD6.G7 DD6.H2 DD6.H9 DD6.K2 DD6.K8 DD6.N1 DD6.N9 DD6.R1 DD6.R9 L15.2 R47.2 R50.2 R52.1 R54.1 | length 155.5
  Top Layer w0.2: v3(103.108,28.233) 103.963,29.088 103.963,29.571 C123.2@103.983,29.591 103.983,30.952 DD6.R9@104.299,31.268 ; L15.2@103.775,40.931 103.825,40.881 C124.2@103.825,39.37 103.825,38.142 DD6.R1@104.299,37.668 ; L15.2@104.302,40.931 L15.2@104.802,40.931 ; DD6.N9@105.897,31.266 105.897,30.123 v1(105.947,30.074) ; DD6.N1@105.899,37.668 105.899,39.328 C125.2@105.857,39.37 105.637,39.59 105.637,40.096 L15.2@104.802,40.931 ; R54.1@107.45,43.175 106.85,43.175 105.452,41.777 105.452,41.581 L15.2@104.802,40.931 ; v1(107.899,37.276) 107.899,37.268 DD6.K2@108.299,36.868 ; DD6.K8@108.297,32.066 v1(108.698,31.665) ; DD6.H2@109.899,36.868 v1(110.301,36.467) ; DD6.H9@109.901,31.266 v1(110.302,31.667) ; DD6.G7@110.701,32.866 110.701,32.88 111.033,33.212 v1(111.033,33.221) ; DD6.F1@111.497,37.666 v1(111.899,37.265) ; DD6.E9@112.297,31.266 112.695,30.868 DD6.D9@113.095,31.268 ; C126.2@112.63,29.612 112.698,29.68 v1@112.698,30.865 ; DD6.D2@113.101,36.866 v1(113.502,37.267) ; v1@113.496,30.869 DD6.C9@113.897,31.27 ; DD6.C1@113.901,37.666 v1(114.302,38.067) ; DD6.B2@114.701,36.866 v1(115.102,37.267) ; DD6.A8@115.501,32.066 115.523,32.088 116.057,32.088 v1(116.076,32.107) ; DD6.A1@115.501,37.666 115.501,37.709 115.87,38.077 v1(115.87,38.116) ; v1(118.137,31.501) 118.195,31.558 118.291,31.558 118.56,31.827 DD1.H1@118.61,31.827 ; v1(118.218,24.118) 118.268,24.118 118.566,23.821 DD1.V1@118.616,23.821 ; v1(119.009,25.826) DD1.R2@119.41,26.227 ; DD1.E2@119.41,34.223 DD1.E2@119.412,34.225 v1(119.737,33.899) ; v1(119.813,29.028) DD1.M3@120.212,28.625 ; DD1.J4@121.014,31.023 v1(121.415,31.424) ; DD1.F5@121.812,33.425 v1(122.213,33.826) ; DD1.N6@122.614,27.823 122.635,27.823 122.916,27.542 v1(122.937,27.542) ; DD1.K7@123.414,30.223 123.414,30.227 v1(123.788,30.602)
  Top Layer w0.4: R50.2@93.634,43.419 93.634,41.616 94.685,40.565 C104.2@96.775,40.565 98.388,40.565 98.42,40.533 ; v1(123.475,17.3) 123.5,17.325 R47.2@124.25,17.325
  Top Layer w1: v3(100.35,39.725) 100.35,40.1 101.181,40.931 L15.2@103.775,40.931
  Layer 3 w0.4: v3(103.108,28.233) 103.108,28.287 104.895,30.074 v1(105.947,30.074) 107.108,30.074 v1(108.698,31.665) 108.701,31.667 v1(110.302,31.667) 111.733,30.237 112.064,30.237 v1(112.694,30.867) ; v1(107.899,37.276) 108.504,37.276 108.739,37.51 108.739,39.177 108.551,39.365 ; v1(111.033,33.221) 111.033,35.734 v1(110.301,36.467) 111.099,37.265 v1(111.899,37.265) ; v1@112.696,30.869 113.496,30.869 114.734,32.107 v1(116.076,32.107) ; v1(113.502,37.267) v1(114.302,38.067) v1(115.102,37.267) 115.102,37.349 v1(115.87,38.116) 115.87,38.051 116.866,37.054 116.866,35.639 115.695,34.468 ; 116.485,33.909 116.976,34.4 119.236,34.4 v1(119.737,33.899) ; 116.683,31.501 117.267,31.501 v1(118.137,31.501) ; v1(119.813,29.028) 120.609,29.824 120.609,30.618 v1(121.415,31.424) 122.213,32.223 v1(122.213,33.826) ; 120.615,28.261 119.009,26.654 v1(119.009,25.826) 119.009,24.881 118.245,24.118 v1(118.218,24.118) 118.218,21.125 122.039,17.304 123.471,17.304 v1(123.475,17.3) ; v1(122.937,27.542) 122.214,28.265 122.214,28.316 123.511,29.614 123.511,30.325 v1(123.788,30.602)
  Layer 3 w0.8: 100.375,39.365 108.551,39.365 109.798,39.365 v1(111.899,37.265) 111.897,37.263 111.897,36.233 113.661,34.468 115.695,34.468 117.46,32.704 117.46,32.124 117.267,31.931 117.267,31.501 117.267,31.497 ; v1(116.076,32.107) 116.683,31.501 116.687,31.497 117.267,31.497 ; 120.512,28.329 v1(119.813,29.028) 117.802,29.028 117.267,29.563 117.267,31.497 ; 120.609,28.265 122.214,28.265
  Bottom Layer w0.3: v1(115.102,37.267) 115.13,37.267 115.505,37.642 116.125,37.642 C118.2@116.731,37.036
  Bottom Layer w0.4: v1(105.947,30.074) 105.947,29.878 106.25,29.575 106.928,29.575 C107.2@106.981,29.523 ; v1(107.899,37.276) 108.174,37.276 C106.2@108.643,37.745 ; v1(108.698,31.665) 109.454,31.665 C112.2@109.46,31.658 ; v1(110.301,36.467) 111.113,36.467 C110.2@111.143,36.497 ; v1(111.033,33.221) 111.796,33.221 C121.2@111.902,33.328 ; C114.2@111.051,38.718 111.899,37.87 v1(111.899,37.265) ; C116.2@112.583,29.912 112.583,30.749 v1@112.698,30.865 ; v1(113.499,30.865) 113.721,30.642 113.721,29.965 C113.2@113.841,29.845 ; v1(114.302,38.067) 114.302,38.767 C108.2@114.397,38.862 ; C109.2@115.342,32.082 116.051,32.082 v1(116.076,32.107) ; v1(115.87,38.116) 116.016,38.116 116.25,38.35 116.25,38.81 C102.2@116.302,38.862 ; C92.2@117.366,31.575 117.44,31.501 v1(118.137,31.501) ; C100.2@117.991,25.013 118.002,25.002 118.002,24.334 v1(118.218,24.118) 118.174,24.075 118.174,23.574 R52.1@118.1,23.5 ; C99.2@118.89,26.591 119.009,26.472 v1(119.009,25.826) 119.15,25.967 C97.2@119.878,25.967 ; C96.2@119.003,28.825 119.123,28.945 119.273,28.945 119.357,29.028 v1(119.813,29.028) ; C117.2@120.609,30.507 120.729,30.627 120.729,30.738 v1(121.415,31.424) ; C93.2@122.144,28.187 122.264,28.067 122.411,28.067 v1(122.937,27.542)
  other v3: 98.63,38.77 97.725,38.775 99.494,38.785 100.375,38.825 97.725,39.725 98.625,39.725 99.5,39.725
DDR_A0: DD1.M4 DD6.N3 | length 34.1
  Top Layer w0.125: DD6.N3@105.899,36.068 105.881,36.05 105.605,36.05 105.497,35.941 105.497,29.905 108.026,27.375 108.953,27.375 109.657,27.375 ccw(c109.657,27.5) 109.782,27.5 109.782,27.661 cw(c109.896,27.661) 109.896,27.775 110.048,27.775 cw(c110.048,27.661) 110.161,27.661 110.161,27.266 ccw(c110.275,27.266) 110.275,27.152 110.427,27.152 ccw(c110.427,27.266) 110.54,27.266 110.54,27.661 cw(c110.654,27.661) 110.654,27.775 110.806,27.775 cw(c110.806,27.661) 110.919,27.661 110.919,27.266 ccw(c111.033,27.266) 111.033,27.152 111.185,27.152 ccw(c111.185,27.266) 111.298,27.266 111.298,27.661 cw(c111.412,27.661) 111.412,27.775 111.564,27.775 cw(c111.564,27.661) 111.677,27.661 111.677,27.266 ccw(c111.791,27.266) 111.791,27.152 111.943,27.152 ccw(c111.943,27.266) 112.056,27.266 112.056,27.661 cw(c112.17,27.661) 112.17,27.775 112.322,27.775 cw(c112.322,27.661) 112.435,27.661 112.435,27.266 ccw(c112.549,27.266) 112.549,27.152 112.701,27.152 ccw(c112.701,27.266) 112.814,27.266 112.814,27.661 cw(c112.928,27.661) 112.928,27.775 113.08,27.775 cw(c113.08,27.661) 113.193,27.661 113.193,27.266 ccw(c113.307,27.266) 113.307,27.152 113.459,27.152 ccw(c113.459,27.266) 113.572,27.266 113.572,27.661 cw(c113.686,27.661) 113.686,27.775 113.838,27.775 cw(c113.838,27.661) 113.951,27.661 113.951,27.266 ccw(c114.065,27.266) 114.065,27.152 114.217,27.152 ccw(c114.217,27.266) 114.33,27.266 114.33,27.661 cw(c114.444,27.661) 114.444,27.775 114.596,27.775 cw(c114.596,27.661) 114.709,27.661 114.709,27.266 ccw(c114.823,27.266) 114.823,27.152 114.975,27.152 ccw(c114.975,27.266) 115.088,27.266 115.088,27.661 cw(c115.202,27.661) 115.202,27.775 115.354,27.775 cw(c115.354,27.661) 115.467,27.661 115.467,27.266 ccw(c115.581,27.266) 115.581,27.152 115.733,27.152 ccw(c115.733,27.266) 115.846,27.266 115.846,27.661 cw(c115.96,27.661) 115.96,27.775 116.112,27.775 cw(c116.112,27.661) 116.226,27.661 116.226,27.266 ccw(c116.339,27.266) 116.339,27.152 116.491,27.152 ccw(c116.491,27.266) 116.605,27.266 116.605,27.661 cw(c116.718,27.661) 116.718,27.775 116.87,27.775 cw(c116.87,27.661) 116.984,27.661 116.984,27.5 ccw(c117.109,27.5) 117.109,27.375 117.55,27.375 117.644,27.375 117.82,27.2 118.182,27.2 118.42,27.437 120.373,27.437 120.624,27.689 120.624,27.986 120.875,28.236 120.875,28.414 121.012,28.552 DD1.M4@121.012,28.625
DDR_A1: DD1.M5 DD6.P7 | length 32.6
  Top Layer w0.2: v1(104.696,32.468) DD6.P7@105.097,32.87 ; v1(121.413,29.028) DD1.M5@121.814,28.627
  Layer 1 w0.125: v1(104.696,32.468) 104.696,32.471 104.356,32.811 104.356,34.091 104.429,34.164 105.154,34.164 105.227,34.091 105.227,32.74 105.899,32.068 105.899,31.467 106.256,31.11 106.256,30.65 106.043,30.436 105.536,30.436 105.25,30.15 105.25,29.769 107.46,27.559 113.057,27.559 113.119,27.559 ccw(c113.119,27.684) 113.244,27.684 113.244,27.982 cw(c113.358,27.982) 113.358,28.096 113.51,28.096 cw(c113.51,27.982) 113.623,27.982 113.623,27.648 ccw(c113.737,27.648) 113.737,27.534 113.889,27.534 ccw(c113.889,27.648) 114.002,27.648 114.002,27.982 cw(c114.116,27.982) 114.116,28.096 114.268,28.096 cw(c114.268,27.982) 114.381,27.982 114.381,27.648 ccw(c114.495,27.648) 114.495,27.534 114.647,27.534 ccw(c114.647,27.648) 114.76,27.648 114.76,27.982 cw(c114.874,27.982) 114.874,28.096 115.026,28.096 cw(c115.026,27.982) 115.139,27.982 115.139,27.684 ccw(c115.264,27.684) 115.264,27.559 115.339,27.559 115.452,27.446 115.588,27.446 115.651,27.446 ccw(c115.651,27.571) 115.776,27.571 115.776,27.982 cw(c115.889,27.982) 115.889,28.096 116.041,28.096 cw(c116.041,27.982) 116.155,27.982 116.155,27.535 ccw(c116.268,27.535) 116.268,27.421 116.42,27.421 ccw(c116.42,27.535) 116.534,27.535 116.534,27.982 cw(c116.647,27.982) 116.647,28.096 116.799,28.096 cw(c116.799,27.982) 116.913,27.982 116.913,27.535 ccw(c117.026,27.535) 117.026,27.421 117.178,27.421 ccw(c117.178,27.535) 117.292,27.535 117.292,27.588 cw(c117.405,27.588) 117.405,27.701 117.557,27.701 cw(c117.557,27.588) 117.671,27.588 117.671,27.571 ccw(c117.796,27.571) 117.796,27.446 118.3,27.446 119.303,27.446 119.42,27.563 120.211,27.563 121.109,28.461 121.109,28.714 121.413,29.018 v1(121.413,29.028)
DDR_A2: DD1.K4 DD6.P3 | length 31.7
  Top Layer w0.2: v1(104.696,35.669) DD6.P3@105.097,36.07 ; DD1.K4@121.01,30.223 121.015,30.223 v1@121.334,29.904
  Layer 2 w0.125: v1(104.696,35.669) 104.696,35.261 104.622,35.188 103.325,35.188 103.275,35.138 103.275,34.925 103.424,34.776 104.857,34.776 108.083,34.776 cw(c108.083,34.651) 108.208,34.651 108.208,34.635 ccw(c108.321,34.635) 108.321,34.522 108.473,34.522 ccw(c108.473,34.635) 108.587,34.635 108.587,34.687 cw(c108.7,34.687) 108.7,34.801 108.852,34.801 cw(c108.852,34.687) 108.966,34.687 108.966,34.609 ccw(c109.079,34.609) 109.079,34.495 109.231,34.495 ccw(c109.231,34.609) 109.345,34.609 109.345,34.687 cw(c109.458,34.687) 109.458,34.801 109.61,34.801 cw(c109.61,34.687) 109.724,34.687 109.724,34.609 ccw(c109.837,34.609) 109.837,34.495 109.989,34.495 ccw(c109.989,34.609) 110.103,34.609 110.103,34.687 cw(c110.216,34.687) 110.216,34.801 110.368,34.801 cw(c110.368,34.687) 110.482,34.687 110.482,34.609 ccw(c110.595,34.609) 110.595,34.495 110.747,34.495 ccw(c110.747,34.609) 110.861,34.609 110.861,34.687 cw(c110.974,34.687) 110.974,34.801 111.126,34.801 cw(c111.126,34.687) 111.24,34.687 111.24,34.607 ccw(c111.353,34.607) 111.353,34.493 111.505,34.493 ccw(c111.505,34.607) 111.619,34.607 111.619,34.687 cw(c111.732,34.687) 111.732,34.801 111.884,34.801 cw(c111.884,34.687) 111.998,34.687 111.998,34.498 ccw(c112.111,34.498) 112.111,34.384 112.263,34.384 ccw(c112.263,34.498) 112.377,34.498 112.377,34.709 cw(c112.49,34.709) 112.49,34.823 112.642,34.823 cw(c112.642,34.709) 112.756,34.709 112.756,34.498 ccw(c112.869,34.498) 112.869,34.384 113.021,34.384 ccw(c113.021,34.498) 113.135,34.498 113.135,34.709 cw(c113.248,34.709) 113.248,34.823 113.4,34.823 cw(c113.4,34.709) 113.514,34.709 113.514,34.498 ccw(c113.627,34.498) 113.627,34.384 113.779,34.384 ccw(c113.779,34.498) 113.893,34.498 113.893,34.709 cw(c114.006,34.709) 114.006,34.823 114.158,34.823 cw(c114.158,34.709) 114.272,34.709 114.272,34.498 ccw(c114.385,34.498) 114.385,34.384 114.537,34.384 ccw(c114.537,34.498) 114.651,34.498 114.651,34.709 cw(c114.764,34.709) 114.764,34.823 114.916,34.823 cw(c114.916,34.709) 115.03,34.709 115.03,34.443 ccw(c115.143,34.443) 115.143,34.329 115.295,34.329 ccw(c115.295,34.443) 115.409,34.443 115.409,34.673 cw(c115.534,34.673) 115.534,34.798 115.596,34.798 117.313,33.08 117.313,30.102 118.205,29.21 119.012,29.21 119.631,28.591 119.994,28.591 120.5,29.098 120.5,29.315 120.902,29.716 121.046,29.716 121.234,29.904 v1(121.335,29.904)
DDR_A3: DD1.L4 DD6.N2 | length 34.7
  Top Layer w0.125: DD6.N2@105.899,36.868 105.936,36.831 105.936,36.593 106.297,36.233 106.297,33.833 107.102,33.028 107.102,31.103 107.136,31.069 107.136,30.269 107.323,30.082 107.367,30.038 ccw(c107.456,30.126) 107.544,30.038 108.198,30.692 cw(c108.278,30.611) 108.359,30.692 108.466,30.584 cw(c108.386,30.504) 108.466,30.424 106.962,28.919 ccw(c107.042,28.839) 106.962,28.758 107.069,28.651 ccw(c107.149,28.732) 107.23,28.651 109.269,30.69 cw(c109.349,30.61) 109.429,30.69 109.537,30.583 cw(c109.456,30.503) 109.537,30.422 107.497,28.383 ccw(c107.578,28.303) 107.497,28.222 107.605,28.115 ccw(c107.685,28.196) 107.765,28.115 109.02,29.369 cw(c109.1,29.289) 109.18,29.369 109.288,29.262 cw(c109.207,29.182) 109.288,29.101 108.884,28.698 ccw(c108.972,28.609) 108.884,28.521 109.059,28.346 109.103,28.302 109.154,28.251 109.275,28.251 109.459,28.434 118.182,28.434 118.379,28.237 120.373,28.237 120.624,28.489 120.624,29.037 DD1.L4@121.012,29.425
DDR_A4: DD1.K6 DD6.P8 | length 32.9
  Top Layer w0.2: v1(104.687,31.674) DD6.P8@105.088,32.076 ; DD1.K6@122.61,30.223 v1(123.011,29.822)
  Layer 1 w0.125: v1(104.687,31.674) 104.687,31.346 104.76,31.272 105.087,31.272 105.16,31.346 105.16,31.991 105.081,32.07 104.37,32.07 104.297,31.997 104.297,31.266 104.297,30.527 ccw(c104.422,30.527) 104.422,30.402 104.637,30.402 cw(c104.637,30.289) 104.751,30.289 104.751,30.137 cw(c104.637,30.137) 104.637,30.023 104.422,30.023 ccw(c104.422,29.898) 104.297,29.898 104.297,29.833 104.605,29.525 104.622,29.509 104.666,29.464 104.757,29.373 cw(c104.668,29.285) 104.757,29.196 104.577,29.016 ccw(c104.657,28.936) 104.577,28.856 104.684,28.748 ccw(c104.764,28.829) 104.845,28.748 105.318,29.222 cw(c105.399,29.141) 105.479,29.222 105.586,29.115 cw(c105.506,29.034) 105.586,28.954 105.113,28.48 ccw(c105.193,28.4) 105.113,28.32 105.22,28.212 ccw(c105.3,28.293) 105.381,28.212 105.854,28.686 cw(c105.935,28.605) 106.015,28.686 106.122,28.579 cw(c106.042,28.498) 106.122,28.418 105.649,27.944 ccw(c105.729,27.864) 105.649,27.784 105.756,27.676 ccw(c105.836,27.757) 105.917,27.676 106.39,28.15 cw(c106.471,28.069) 106.551,28.15 106.658,28.043 cw(c106.578,27.962) 106.658,27.882 106.296,27.519 ccw(c106.376,27.439) 106.296,27.359 106.403,27.251 ccw(c106.483,27.332) 106.564,27.251 106.633,27.32 cw(c106.721,27.232) 106.81,27.32 106.821,27.309 106.887,27.309 115.236,27.309 115.349,27.196 119.407,27.196 119.524,27.313 120.314,27.313 121.699,28.698 122.328,28.698 123.011,29.381 v1(123.011,29.822)